# Altium PCB PCB1_layout.PcbDoc
Units mm, origin at the board's own origin, x right, y up, seen from the top; angles counter-clockwise.
Board outline 80 x 80 mm, 2 copper layers (Top Layer, Bottom Layer), stack 1.671 mm thick; 11 components, 3 nets, 68 pads, 588 vias.
Unrouted connection lines stored in the file: 9.
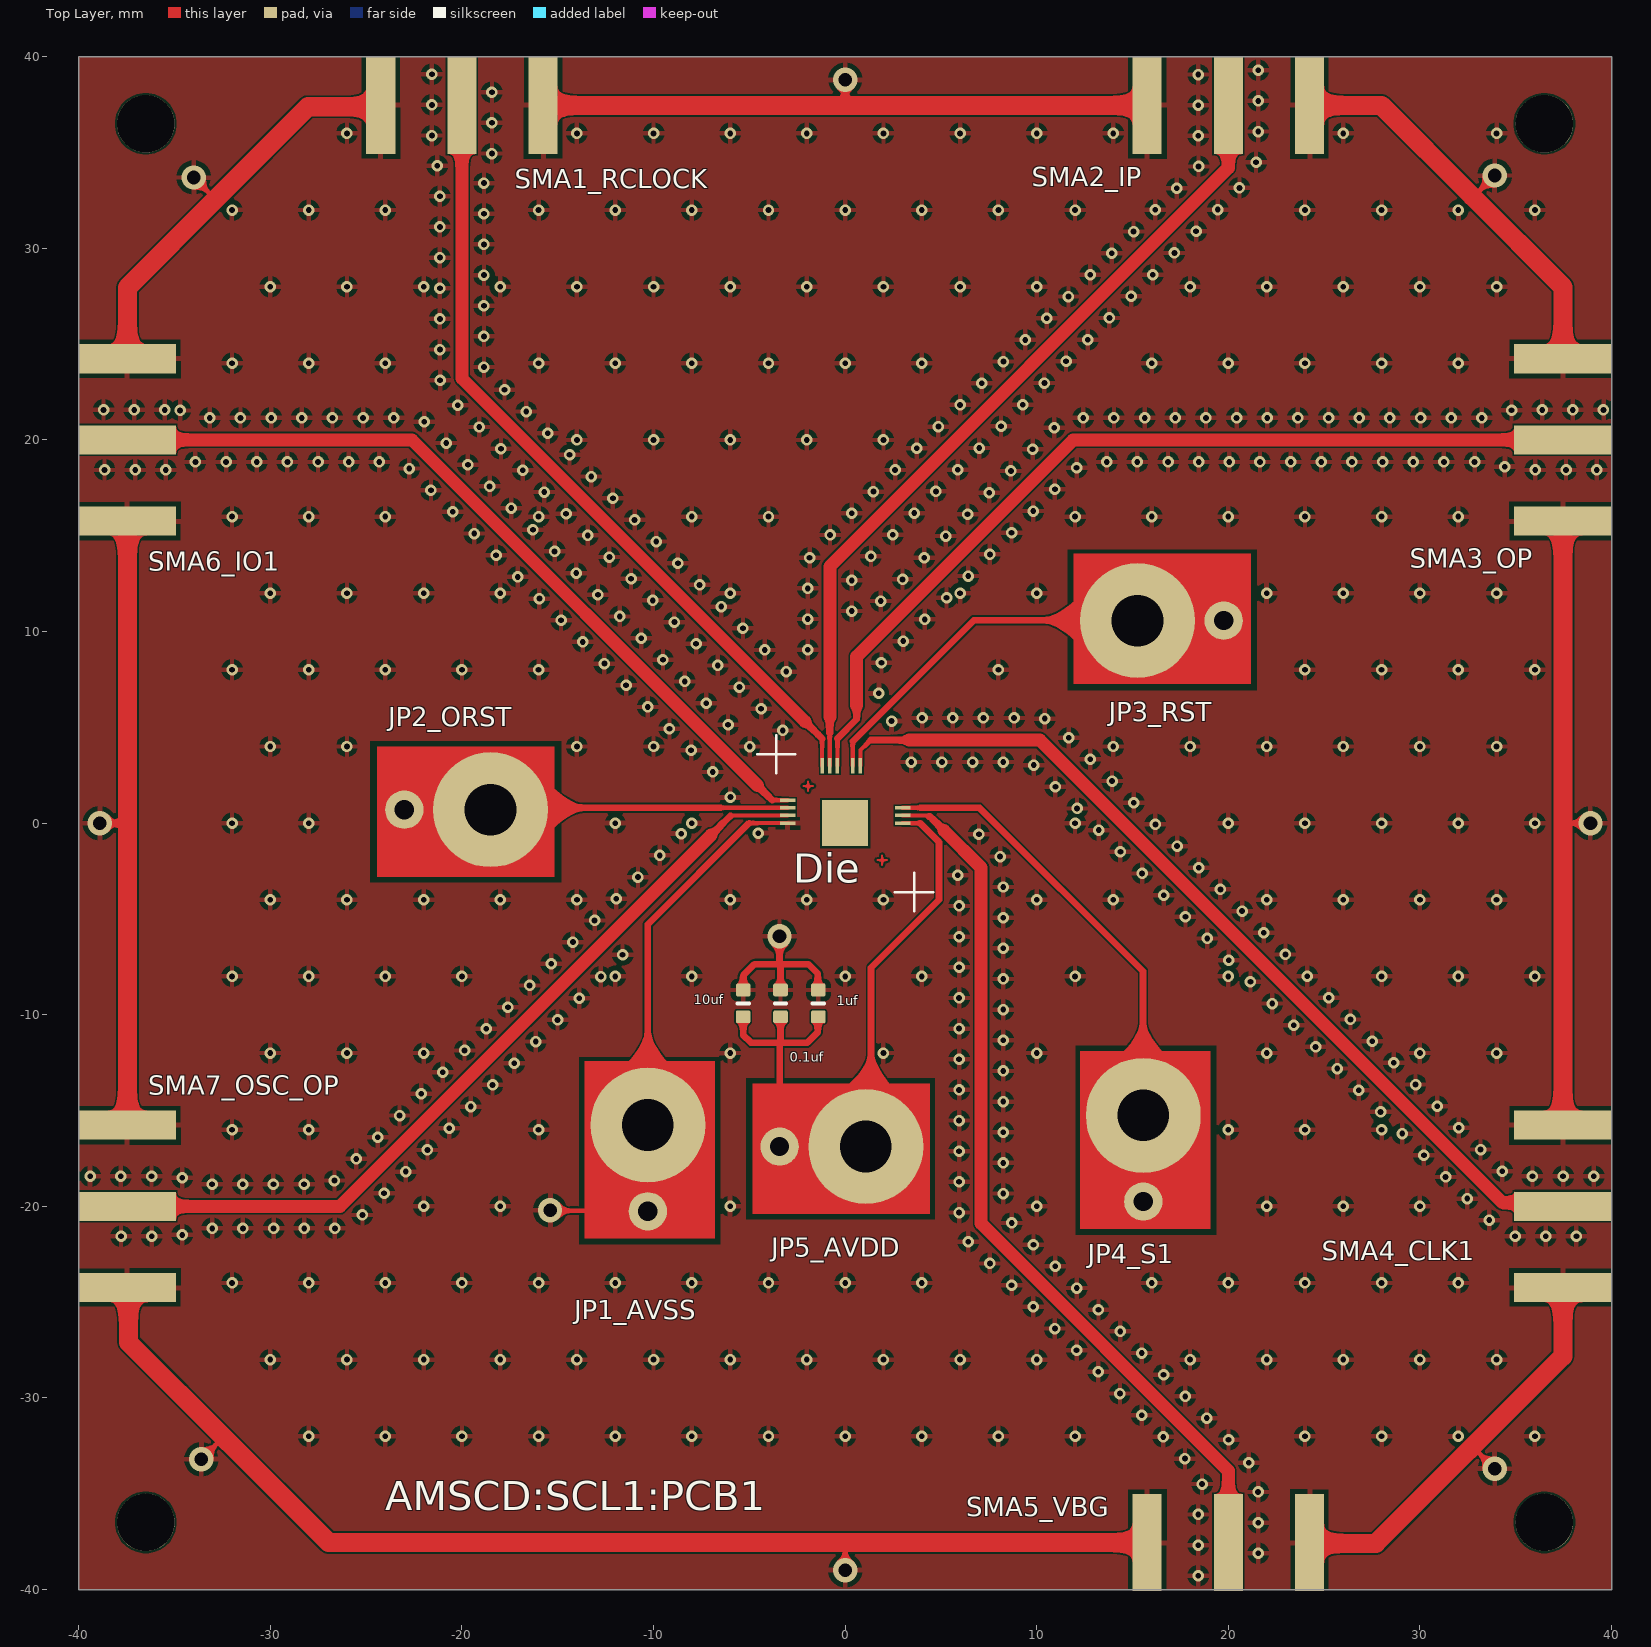
[diagram p0: Top Layer view]
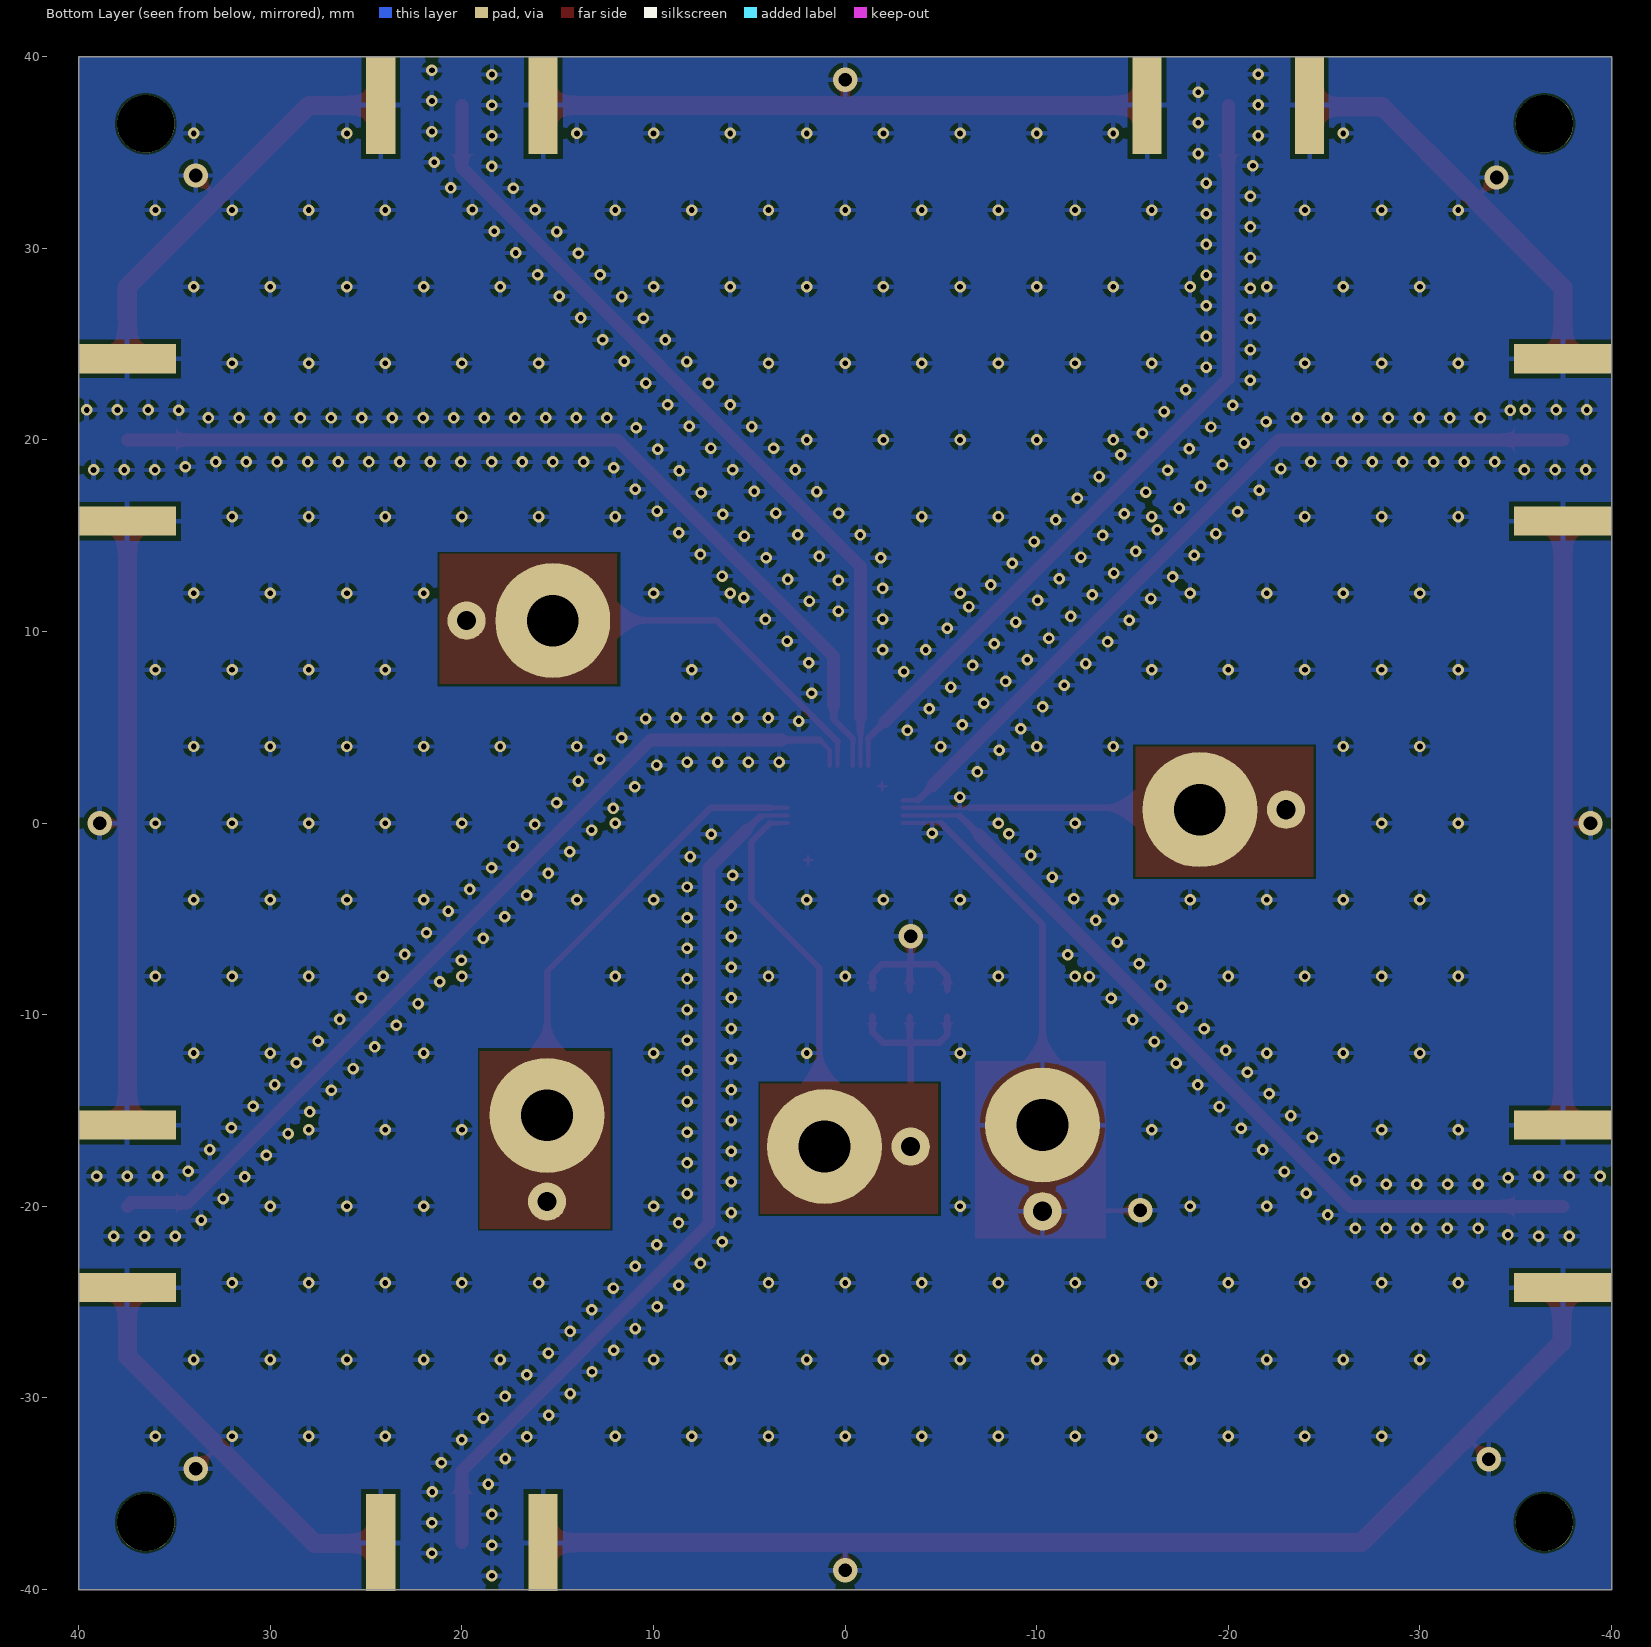
[diagram p1: Bottom Layer view, seen from below]
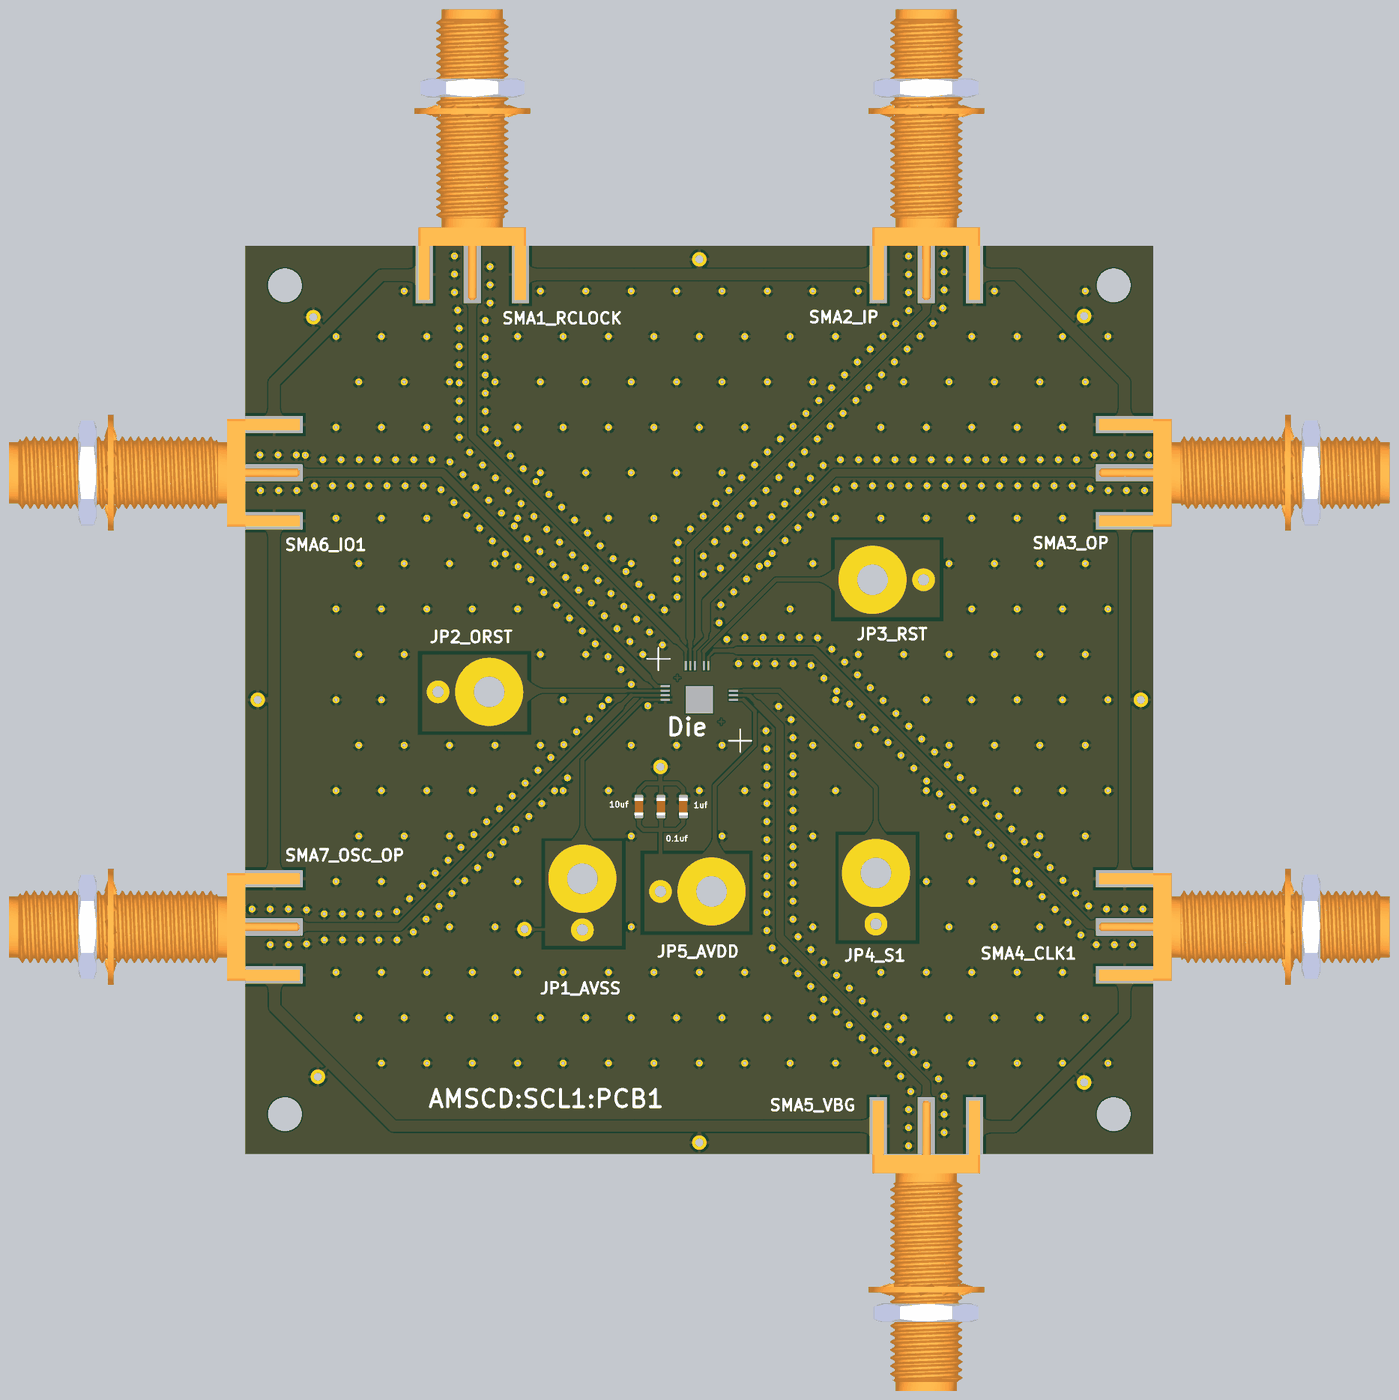
[diagram p2: 3D render of the assembled board from above, using the file's embedded part models]

## Layer stack, top to bottom
Top Solder: solder mask 0.0102, Solder Resist, Dk 3.5
Top Layer: signal copper 0.0356
Dielectric 1: dielectric 1.6, FR-4, Dk 4.5
Bottom Layer: signal copper 0.0356
Bottom Solder: solder mask 0.0102, Solder Resist, Dk 3.5

## Board outline
-40,-40 -40,40 40,40 40,-40

## Design rules (kind name [scope] priority, off if disabled: settings)
Clearance [All] p1: gap=0.1 ignorepadtopadclearanceinfootprint=FALSE
HoleSize [All] p1: absolutevalues=TRUE maxlimit=6 minlimit=0.025 maxpercent=80.000 minpercent=20.000
MinimumSolderMaskSliver [All] p1: minsoldermaskwidth=0.1
PolygonConnect [All] p1: connectstyle=Relief reliefconductorwidth=0.254 reliefentries=4 polygonreliefangle="90 Angle" airgapwidth=0.254
RoutingVias [All] p1: holewidth=0.711 width=1.27 viastyle="Through Hole" minholewidth=0.711 minwidth=1.27 maxholewidth=0.711 maxwidth=1.27
SolderMaskExpansion [All] p1: expansion=0 istentingtop=FALSE
UnRoutedNet [All] p1 off:
Width [All] p1: maxlimit=1.2 minlimit=0.1 preferedwidth=0.254 bottomlayer_minwidth=0.254 bottomlayer_maxwidth=0.254 minimp=50.000000 maximp=50.000000 favimp=50.000000
27 further rules are at their usual default settings.

## Components (designator, comment, footprint, x,y, rotation, side; value= is the part's Value field where it differs from the comment)
0.1uf "Comment" CAPC0603(1608)100_L -3.373,-9.409 r270 top
1uf "Comment" CAPC0603(1608)100_L -1.4,-9.409 r270 top
10uf "Comment" CAPC0603(1608)100_L -5.323,-9.409 r270 top
Die "Comment" COB1 0,0 r0 top
SMA1_RCLOCK "Comment" TE_CONSMA003.062-L-G -20,40 r180 top
SMA2_IP "Comment" TE_CONSMA003.062-L-G 20,40 r180 top
SMA3_OP "Comment" TE_CONSMA003.062-L-G 40,20 r90 top
SMA4_CLK1 "Comment" TE_CONSMA003.062-L-G 40,-20 r90 top
SMA5_VBG "Comment" TE_CONSMA003.062-L-G 20,-40.09 r0 top
SMA6_IO1 "Comment" TE_CONSMA003.062-L-G -40,20 r270 top
SMA7_OSC_OP "Comment" TE_CONSMA003.062-L-G -40,-20 r270 top

## Footprints (in the part's own frame and the unit in brackets; to place one, negate y for a bottom-side part, rotate by r counter-clockwise, add the part's x,y. Pads: shape width x height; smd on the part's side, far side on the other; paste and mask are expansions set on the pad)
CAPC0603(1608)100_L [mm] "Chip Capacitor, Body 1.6x0.8mm, Height 1.0mm, IPC High Density"
  rrect25% 0.66x0.76 smd: 1(-0.7,0) 2(0.7,0)
  silkscreen extent 0,-0.3 0,0.3, body extent -0.8,-0.4 0.8,0.4, height 0.95
COB1 [mm]
  rect 2.4x2.4 smd: 35(0,0)
  rect 0.8x0.18 smd: JP1_AVSS(-3,0) JP2_ORST(-3,0.8) JP4_S1(3,0.8) JP5_AVDD(3,0) SMA5_VBG(3,0.4) SMA6_IO1(-3,1.2) SMA7_OSC_OP(-3,0.4)
  rect 0.18x0.8 smd: JP3_RST(0.4,3) SMA1_RCLOCK(-1.2,3) SMA2_IP(-0.8,3) SMA3_OP(-0.4,3) SMA4_CLK1(0.8,3)
  silkscreen extent -4.6,-4.6 4.6,4.6
TE_CONSMA003.062-L-G [mm]
  rect 1.52x5.08 smd: 1(0,2.54) 2(-4.24,2.54) 3(4.24,2.54)
  rect 1.52x5.08 smd far side: 4(-4.24,2.54) 5(4.24,2.54)
  body extent -5.1,-20.8 5.1,4.8, height 5.5

## Free pads (board coordinates)
  round 3 hole 3 unplated: 36(-36.5,-36.5) 36(-36.5,36.5) 36(36.5,-36.5) 36(36.5,36.5)
  round 2 hole 1: ""(-23.01,0.7) ""(-10.3,-20.26) ""(-3.42,-16.88) ""(15.56,-19.75) ""(19.76,10.57)
  round 6 hole 2.7: ""(-18.51,0.7) ""(-10.3,-15.76) ""(1.08,-16.88) ""(15.26,10.57) ""(15.56,-15.25)

## Via types
v1: diameter 0.6, hole 0.3, Top Layer to Bottom Layer, 578 vias
v2: diameter 1.27, hole 0.711, Top Layer to Bottom Layer, 10 vias

## Nets (pads, with @x,y where several pads share a name; then routed paths per layer and width w, separated by ;. In a path a pad name is that pad's centre, name@x,y a point inside that pad or via, vN(x,y) a via of type N, cw(c..) or ccw(c..) an arc to the next point about the centre after c; other vN are vias at no path point)
DC: 0.1uf.2 1uf.2 10uf.2 Die.JP2_ORST Die.JP3_RST Die.JP4_S1 Die.JP5_AVDD pad.@1.08,-16.88 pad.@15.26,10.57 pad.@15.56,-15.25 pad.@15.56,-19.75 pad.@19.76,10.57 pad.@-3.42,-16.88 pad.@-18.51,0.7 pad.@-23.01,0.7 | length 90.5
  Top Layer w0.22: -6.498,0.798 Die.JP2_ORST@-3,0.798 ; Die.JP3_RST 0.4,4.27 ; Die.JP5_AVDD 3.91,0 ; Die.JP4_S1 3.925,0.8
  Top Layer w0.254: pad.@-18.51,0.7 pad.@-18.412,0.798
  Top Layer w0.35: pad.@-18.412,0.798 -6.498,0.798 ; 10uf.2 -5.323,-11.059 -4.923,-11.459 -3.448,-11.459 ; pad.@-3.42,-16.88 -3.42,-11.487 -3.448,-11.459 ; -3.373,-11.384 0.1uf.2 ; 1uf.2@-1.423,-10.084 -1.423,-10.909 -1.973,-11.459 -3.448,-11.459 ; 0.4,4.27 6.72,10.59 pad.@15.25,10.59 ; pad.@1.08,-16.88 1.35,-16.61 1.35,-7.55 4.9,-4 4.9,-0.99 3.91,0 ; 3.925,0.8 7.02,0.8 15.55,-7.73 pad.@15.55,-15.25 ; pad.@15.25,10.58 pad.@15.26,10.57
GND: 0.1uf.1 1uf.1 10uf.1 Die.JP1_AVSS pad.@-10.3,-15.76 pad.@-10.3,-20.26 SMA1_RCLOCK.2 SMA1_RCLOCK.3 SMA1_RCLOCK.4 SMA1_RCLOCK.5 SMA2_IP.2 SMA2_IP.3 SMA2_IP.4 SMA2_IP.5 SMA3_OP.2 SMA3_OP.3 SMA3_OP.4 SMA3_OP.5 SMA4_CLK1.2 SMA4_CLK1.3 SMA4_CLK1.4 SMA4_CLK1.5 SMA5_VBG.2 SMA5_VBG.3 SMA5_VBG.4 SMA5_VBG.5 SMA6_IO1.2 SMA6_IO1.3 SMA6_IO1.4 SMA6_IO1.5 SMA7_OSC_OP.2 SMA7_OSC_OP.3 SMA7_OSC_OP.4 SMA7_OSC_OP.5 | length 264
  Top Layer w0.22: -5.01,0 Die.JP1_AVSS
  Top Layer w0.254: v2(-38.9,0) -37.46,0 ; SMA7_OSC_OP.3 SMA7_OSC_OP.3@-37.41,-24.29 ; v2(-34,33.7) -32.975,32.675 -32.745,32.675 ; v2(-33.6,-33.2) -32.72,-32.32 -32.18,-32.32 ; SMA1_RCLOCK.3@-24.31,37.39 SMA1_RCLOCK.3 ; v2(-15.4,-20.2) -15.37,-20.23 -10.33,-20.23 pad.@-10.3,-20.26 ; v2(0,-39) 0,-37.65 0.1,-37.55 ; 0,37.46 v2(0,38.8) ; SMA5_VBG.3 SMA5_VBG.3@24.28,-37.59 ; 32.58,-32.71 32.91,-32.71 v2(33.9,-33.7) ; 32.727,32.723 32.823,32.723 v2(33.9,33.8) ; 37.46,-0.1 37.56,0 v2(38.9,0) ; 37.46,26.427 37.465,26.432
  Top Layer w0.35: pad.@-10.3,-15.76 -10.3,-5.29 -5.01,0 ; 10uf.1 -5.323,-7.959 -4.723,-7.359 -3.323,-7.359 ; v2(-3.423,-5.909) -3.423,-7.259 -3.323,-7.359 ; 0.1uf.1 -3.373,-7.409 -3.323,-7.359 ; 1uf.1@-1.423,-8.634 -1.423,-7.859 -1.923,-7.359 -3.323,-7.359
  Top Layer w1: SMA7_OSC_OP.2 -37.46,0 SMA6_IO1.3 ; SMA6_IO1.2 -37.46,27.96 -32.745,32.675 -28.03,37.39 SMA1_RCLOCK.3@-24.31,37.39 ; SMA7_OSC_OP.3@-37.41,-24.29 -37.41,-27.09 -32.18,-32.32 -26.95,-37.55 0.1,-37.55 SMA5_VBG.2 ; SMA1_RCLOCK.2 0,37.46 SMA2_IP.3 ; SMA2_IP.2 27.99,37.46 32.727,32.723 37.465,27.985 37.465,26.432 ; SMA5_VBG.3@24.28,-37.59 27.7,-37.59 32.58,-32.71 37.46,-27.83 SMA4_CLK1.2 ; SMA4_CLK1.3 37.46,-0.1 SMA3_OP.2 ; SMA3_OP.3 37.46,26.427
  other v1: 18.433,-39.283 21.567,-38.108 18.433,-37.683 21.567,-36.508 18.433,-36.083 21.554,-34.908 18.627,-34.495 21.069,-33.383 17.737,-33.165 20.011,-32.183 16.606,-32.034 -28,-32 -24,-32 -20,-32 -16,-32 -12,-32 -8,-32 -4,-32 0,-32 4,-32 8,-32 12,-32 24,-32 28,-32 32,-32 36,-32 18.88,-31.052 15.475,-30.902 17.748,-29.921 14.343,-29.771 16.617,-28.789 13.212,-28.64 -30,-28 -26,-28 -22,-28 -18,-28 -14,-28 -10,-28 -6,-28 -2,-28 2,-28 6,-28 10,-28 18,-28 22,-28 26,-28 30,-28 34,-28 15.486,-27.658 12.081,-27.508 14.354,-26.527 10.949,-26.377 13.223,-25.395 9.818,-25.245 12.091,-24.264 8.686,-24.114 -32,-24 -28,-24 -24,-24 -20,-24 -16,-24 -12,-24 -8,-24 -4,-24 0,-24 4,-24 16,-24 20,-24 24,-24 28,-24 32,-24 10.96,-23.132 7.555,-22.983 9.829,-22.001 6.424,-21.851 -37.793,-21.567 -36.193,-21.567 34.968,-21.567 36.568,-21.567 38.168,-21.567 -34.595,-21.491 -33.032,-21.151 -31.432,-21.151 -29.832,-21.151 -28.232,-21.151 -26.632,-21.151 8.697,-20.87 33.612,-20.718 -25.193,-20.451 5.949,-20.323 -22,-20 -18,-20 -6,-20 10,-20 22,-20 26,-20 30,-20 32.47,-19.597 8.251,-19.333 -24.062,-19.319 -33.04,-18.849 -31.44,-18.849 -29.84,-18.849 -28.24,-18.849 5.949,-18.723 -26.652,-18.655 -34.603,-18.505 31.338,-18.466 -39.401,-18.433 -37.801,-18.433 -36.201,-18.433 35.873,-18.433 37.473,-18.433 39.073,-18.433 -22.93,-18.188 34.295,-18.167 8.251,-17.733 -25.521,-17.523 30.207,-17.335 5.949,-17.123 -21.799,-17.057 33.164,-17.036 -24.39,-16.392 29.076,-16.203 8.251,-16.133 -32,-16 -28,-16 -16,-16 20,-16 24,-16 28,-16 -20.668,-15.925 32.032,-15.905 5.949,-15.523 -23.258,-15.261 27.944,-15.072 -19.536,-14.794 30.901,-14.773 8.251,-14.533 -22.127,-14.129 5.949,-13.923 26.813,-13.94 -18.405,-13.663 29.77,-13.642 -20.995,-12.998 8.251,-12.933 25.681,-12.809 -17.274,-12.531 28.638,-12.511 5.949,-12.323 -30,-12 -26,-12 -22,-12 -6,-12 2,-12 10,-12 22,-12 30,-12 34,-12 -19.864,-11.866 24.55,-11.678 -16.142,-11.4 27.507,-11.379 8.251,-11.333 -18.733,-10.735 5.949,-10.723 23.419,-10.546 -15.011,-10.268 26.375,-10.248 8.251,-9.733 -17.601,-9.604 22.287,-9.415 -13.879,-9.137 5.949,-9.123 25.244,-9.116 -16.47,-8.472 21.156,-8.284 8.251,-8.133 -12.748,-8.006 -32,-8 -28,-8 -24,-8 -20,-8 -12,-8 -8,-8 0,-8 4,-8 12,-8 20,-8 24.113,-7.985 28,-8 32,-8 36,-8 5.949,-7.523 -15.339,-7.341 20.025,-7.152 -11.617,-6.874 22.981,-6.854 8.251,-6.533 -14.207,-6.21 18.893,-6.021 5.949,-5.923 21.85,-5.722 -13.076,-5.078 8.251,-4.933 17.762,-4.889 20.719,-4.591 5.949,-4.323 -30,-4 -26,-4 -22,-4 -18,-4 -14,-4 -6,-4 -2,-4 2,-4 10,-4 14,-4 22,-4 26,-4 30,-4 34,-4 -11.945,-3.947 16.63,-3.758 19.587,-3.46 8.251,-3.333 -10.813,-2.816 5.874,-2.725 15.499,-2.627 18.456,-2.328 8.087,-1.742 -9.682,-1.684 14.368,-1.495 17.324,-1.197 6.985,-0.582 -8.55,-0.553 -4.538,-0.526 13.236,-0.364 16.193,-0.065 -32,0 -28,0 -12,0 -8,0 12,0 20,0 24,0 28,0 32,0 36,0 12.105,0.767 15.062,1.066 -5.99,1.359 10.974,1.899 13.93,2.197 -6.908,2.67 9.842,3.03 3.45,3.189 5.05,3.189 6.65,3.189 8.25,3.189 12.799,3.329 -8.039,3.801 -30,4 -26,4 -14,4 -10,4 -4.982,3.999 14,4 18,4 22,4 26,4 30,4 34,4 11.668,4.46 -3.254,4.836 -9.17,4.933 -6.113,5.131 2.424,5.325 10.415,5.456 4.016,5.491 5.616,5.491 7.216,5.491 8.816,5.491 -4.385,5.968 -10.302,6.064 -7.244,6.262 1.751,6.777 -5.517,7.099 -11.433,7.195 -8.376,7.393 -3.07,7.908 -32,8 -28,8 -24,8 -20,8 -16,8 8,8 24,8 28,8 32,8 36,8 -6.648,8.23 -12.564,8.327 1.898,8.37 -9.507,8.525 -4.202,9.039 -1.951,9.051 -7.779,9.362 -13.696,9.458 3.029,9.501 -10.638,9.656 -5.333,10.171 -8.911,10.493 -14.827,10.59 4.16,10.633 -1.951,10.651 -11.77,10.787 0.351,11.069 -6.465,11.302 1.863,11.591 -10.042,11.625 -15.958,11.721 5.292,11.764 -12.901,11.919 -30,12 -26,12 -22,12 -18,12 -6,12 6,12 10,12 22,12 26,12 30,12 34,12 -1.951,12.251 -7.596,12.433 0.351,12.669 2.995,12.722 -11.174,12.756 -17.09,12.852 6.423,12.895 -14.033,13.05 -8.727,13.565 -1.855,13.848 4.126,13.854 -12.305,13.887 1.348,13.92 -18.221,13.984 7.554,14.027 -15.164,14.182 -9.859,14.696 5.258,14.985 -13.436,15.019 -0.788,15.04 2.479,15.052 -19.353,15.115 8.686,15.158 -16.295,15.313 -10.99,15.828 -32,16 -28,16 -24,16 -16,16 -8,16 -4,16 12,16 16,16 20,16 24,16 28,16 32,16 6.389,16.116 -14.568,16.15 0.344,16.171 3.611,16.183 -20.484,16.246 9.817,16.29 -17.427,16.444 -12.121,16.959 7.52,17.248 -15.699,17.281 1.475,17.303 4.742,17.315 -21.615,17.378 10.949,17.421 -18.558,17.576 -13.253,18.09 8.652,18.379 -38.655,18.433 -37.055,18.433 -35.455,18.433 -16.83,18.413 2.607,18.434 36.024,18.433 37.624,18.433 39.224,18.433 5.874,18.446 -22.747,18.509 12.08,18.552 34.433,18.605 -19.689,18.707 -33.91,18.849 -32.31,18.849 -30.71,18.849 -29.11,18.849 -27.51,18.849 -25.91,18.849 -24.31,18.849 13.652,18.849 15.252,18.849 16.852,18.849 18.452,18.849 20.052,18.849 21.652,18.849 23.252,18.849 24.852,18.849 26.452,18.849 28.052,18.849 29.652,18.849 31.252,18.849 32.852,18.849 -14.384,19.222 9.783,19.511 -17.962,19.544 3.738,19.565 7.005,19.577 -20.821,19.838 -14,20 -10,20 -6,20 -2,20 2,20 -15.515,20.353 10.914,20.642 -19.093,20.676 4.869,20.697 8.136,20.709 -21.972,20.95 -33.159,21.151 -31.559,21.151 -29.959,21.151 -28.359,21.151 -26.759,21.151 -25.159,21.151 -23.559,21.151 12.431,21.151 14.031,21.151 15.631,21.151 17.231,21.151 18.831,21.151 20.431,21.151 22.031,21.151 23.631,21.151 25.231,21.151 26.831,21.151 28.431,21.151 30.031,21.151 31.631,21.151 33.231,21.151 -16.647,21.484 -34.711,21.539 34.781,21.549 -38.705,21.567 -37.105,21.567 -35.505,21.567 36.381,21.567 37.981,21.567 39.581,21.567 -20.225,21.807 6.001,21.828 9.268,21.84 -17.778,22.616 7.132,22.96 10.399,22.971 -21.141,23.118 -18.849,23.805 -32,24 -28,24 -24,24 -16,24 -12,24 -8,24 -4,24 0,24 4,24 16,24 20,24 24,24 28,24 32,24 8.263,24.091 11.53,24.103 -21.151,24.718 9.395,25.222 12.662,25.234 -18.849,25.405 -21.151,26.318 10.526,26.354 13.793,26.366 -18.849,27.005 11.657,27.485 14.925,27.497 -21.151,27.918 -30,28 -26,28 -22,28 -18,28 -14,28 -10,28 -6,28 -2,28 2,28 6,28 10,28 18,28 22,28 26,28 30,28 34,28 -18.849,28.605 12.789,28.616 16.056,28.628 -21.151,29.518 13.92,29.748 17.187,29.76 -18.849,30.205 15.052,30.879 18.319,30.891 -21.151,31.118 -18.849,31.805 -32,32 -28,32 -24,32 -16,32 -12,32 -8,32 -4,32 0,32 4,32 8,32 12,32 24,32 28,32 32,32 36,32 16.183,32.011 19.45,32.022 -21.151,32.718 17.314,33.142 20.581,33.154 -18.849,33.405 18.446,34.273 -21.283,34.313 21.446,34.5 -18.433,34.95 -21.567,35.887 18.433,35.873 -26,36 -14,36 -10,36 -6,36 -2,36 2,36 6,36 10,36 14,36 26,36 34,36 21.567,36.095 -18.433,36.55 -21.567,37.487 18.433,37.473 21.567,37.695 -18.433,38.15 -21.567,39.087 18.433,39.073 21.567,39.295
SIG: Die.SMA1_RCLOCK Die.SMA2_IP Die.SMA3_OP Die.SMA4_CLK1 Die.SMA5_VBG Die.SMA6_IO1 Die.SMA7_OSC_OP SMA1_RCLOCK.1 SMA2_IP.1 SMA3_OP.1 SMA4_CLK1.1 SMA5_VBG.1 SMA6_IO1.1 SMA7_OSC_OP.1 | length 311.7
  Top Layer w0.22: -5.944,0.4 Die.SMA7_OSC_OP ; -3.81,1.2 Die.SMA6_IO1 ; Die.SMA1_RCLOCK@-1.201,3 -1.201,4.411 ; Die.SMA2_IP -0.8,4.67 ; Die.SMA3_OP -0.398,4.422 ; Die.SMA4_CLK1 0.8,3.81 1.33,4.34 ; Die.SMA5_VBG 4.32,0.4 4.37,0.35
  Top Layer w0.254: -5.97,0.374 -5.944,0.4 ; -2.09,5.3 -2.08,5.3
  Top Layer w0.35: -7,-0.63 -5.996,0.374 -5.97,0.374 ; -4.58,1.97 -3.81,1.2 ; -2.09,5.3 -1.201,4.411 ; -0.8,4.67 -0.8,5.54 ; -0.398,4.422 0.6,5.42 0.6,6.138 ; 1.33,4.34 3.33,4.34 ; 4.37,0.35 4.426,0.35 5.163,-0.387
  Top Layer w0.675: SMA7_OSC_OP.1 -26.37,-20 -7,-0.63 ; SMA6_IO1.1 -22.61,20 -4.58,1.97 ; SMA1_RCLOCK.1 -20,23.21 -2.09,5.3 ; -0.8,5.54 -0.8,13.4 20,34.2 SMA2_IP.1 ; 0.6,6.138 0.6,8.7 11.9,20 SMA3_OP.1 ; 3.33,4.34 10.16,4.34 34.303,-19.803 37.263,-19.803 SMA4_CLK1.1 ; 5.163,-0.387 7.1,-2.324 7.1,-20.9 20,-33.8 SMA5_VBG.1
pads on no net: Die.35
copper on no net: | length 2
  Top Layer w0.1: -2.183,1.933 -1.683,1.933 ; -1.933,1.683 -1.933,2.183 ; 1.683,-1.933 2.183,-1.933 ; 1.933,-2.183 1.933,-1.683

## Polygon pours and split planes (outlines as drawn)
GND on Bottom Layer "GND_L02_P002" (solid, pour order 2): -40,40 40,40 40,-40 -40,-40
GND on Top Layer "GND_L01_P009" (solid, pour order 9): -40,40 40,40 40,-40 -40,-40

## Other copper
Top Layer:
  region net DC: 11.92,14.07 21.17,14.07 21.17,7.28 11.92,7.28
  region net DC: 19.06,-11.91 19.06,-21.16 12.27,-21.16 12.27,-11.91
  region net DC: -15.17,-2.8 -24.42,-2.8 -24.42,3.99 -15.17,3.99
  region net DC: 4.42,-20.38 -4.83,-20.38 -4.83,-13.59 4.42,-13.59
  region net GND: -6.8,-12.42 -6.8,-21.67 -13.59,-21.67 -13.59,-12.42
  pour cut-out: 21.5,6.9 11.6,6.9 11.6,14.3 21.5,14.3
  pour cut-out: 12,-21.5 12,-11.6 19.4,-11.6 19.4,-21.5
  pour cut-out: -5.2,-13.3 4.7,-13.3 4.7,-20.7 -5.2,-20.7
  pour cut-out: -13.9,-22 -13.9,-12.2 -6.5,-12.2 -6.5,-22
  pour cut-out: -24.8,4.3 -14.8,4.3 -14.8,-3.1 -24.8,-3.1
Bottom Layer:
  pour cut-out: -15.05,-2.9 -24.55,-2.9 -24.55,4.1 -15.05,4.1
  pour cut-out: 21.25,7.15 11.75,7.15 11.75,14.15 21.25,14.15
  pour cut-out: 12.15,-21.25 12.15,-11.75 19.15,-11.75 19.15,-21.25
  pour cut-out: -5,-13.5 4.5,-13.5 4.5,-20.5 -5,-20.5

## Silkscreen, mask and mechanical layers (free items; w line width, h text height)
Top Overlay:
  text "JP3_RST" at 13.75,5.317 h1
  text "JP2_ORST" at -23.85,5.067 h1
  text "JP5_AVDD" at -3.85,-22.633 h1
  text "JP4_S1" at 12.65,-22.983 h1
  text "JP1_AVSS" at -14.15,-25.883 h1
  text "AMSCD:SCL1:PCB1" at -24,-35.85 h1.52
Mechanical 1:
  lines w0.05: -1,-1 -1,1 1,1 1,-1 -1,-1